# EAGLE board PD-adder (EAGLE 6.6.0)
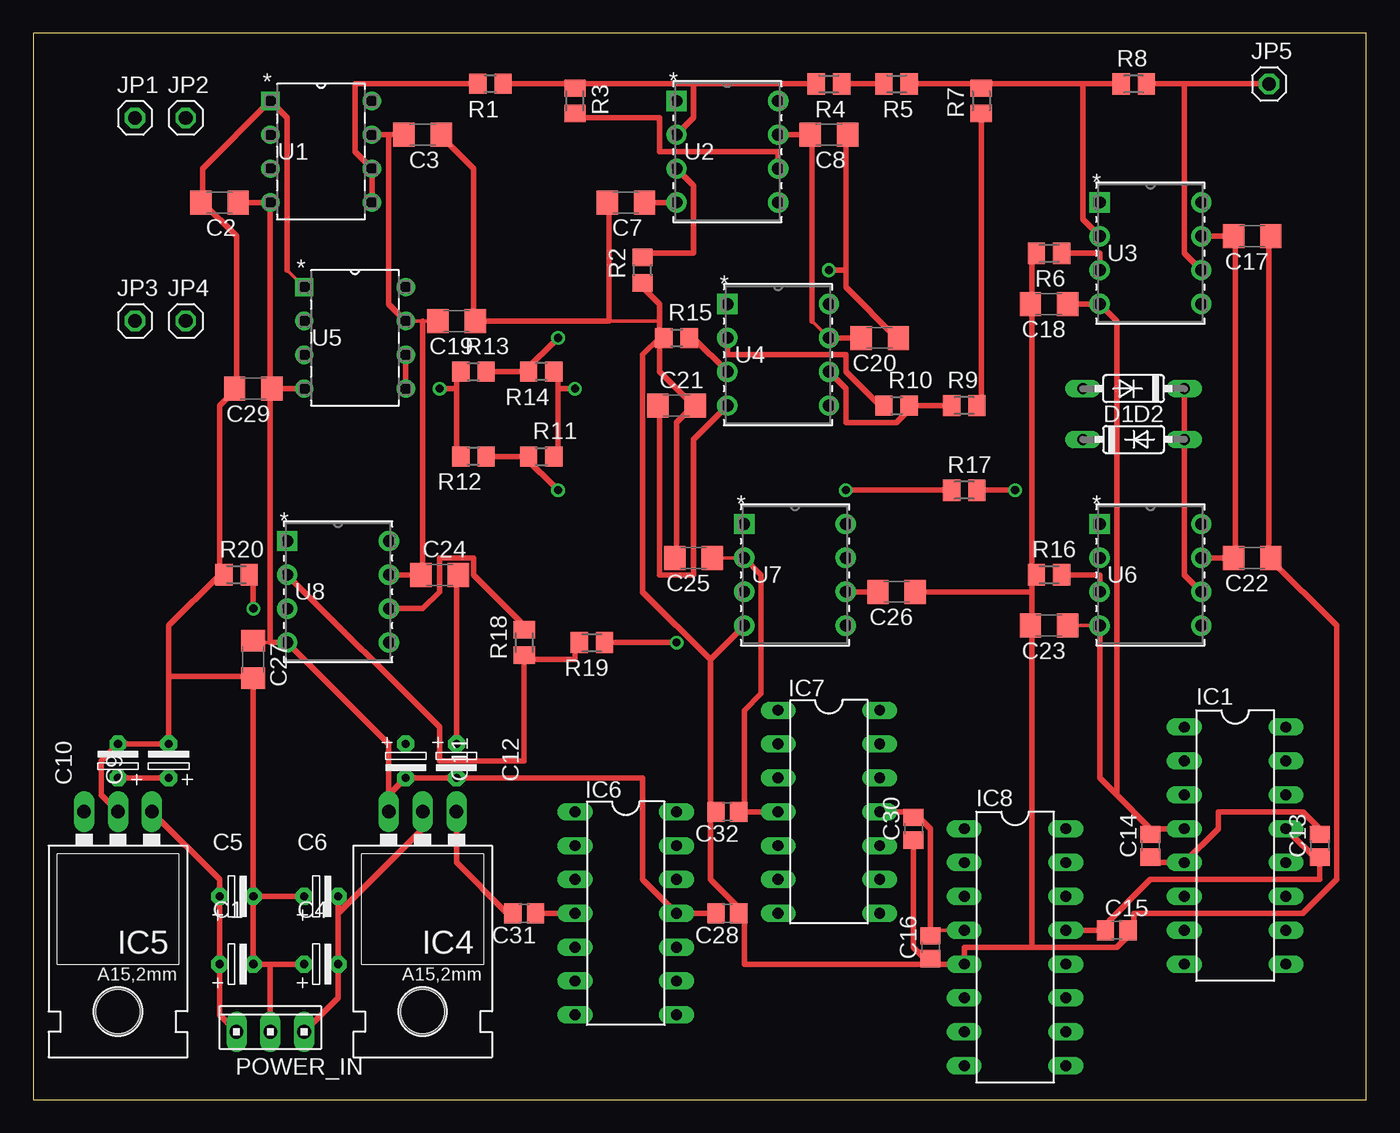
[diagram p0: board, top side]
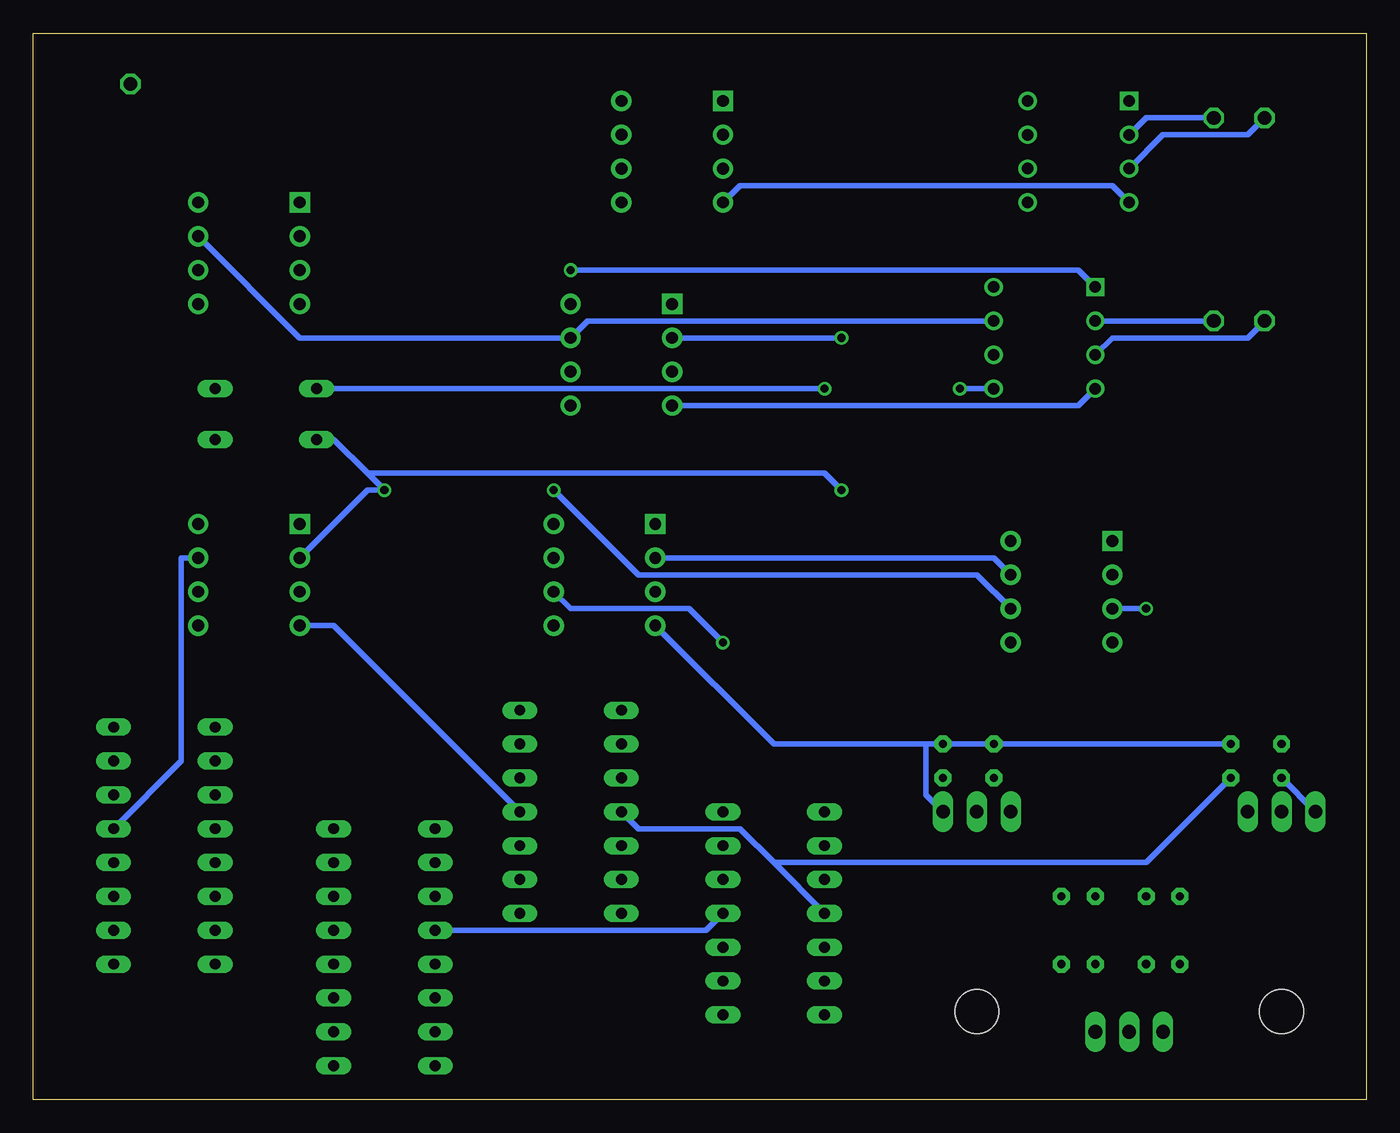
[diagram p1: board, bottom side, seen from below]

Size 100 x 80 mm. Coordinates in mm from the lower left corner, seen from the top.
Outline: 0,0 100,0 100,80 0,80 0,0
Copper layers (1*16): Top 0.035mm / dielectric 1.5mm / Bottom 0.035mm
Design rules "default": minimum track width 10mil, minimum drill 24mil, track to track 8mil, track to pad 8mil, pad to pad 8mil, via to via 8mil, smd to smd 8mil, copper to edge 40mil, drill to drill 8mil, minimum pad ring 10mil, minimum via ring 8mil, stop-mask expansion 4mil, vias tented up to drill 0mil, thermal gap 10mil
Net classes: 1 GND: width 0.406 mm, drill 0.61 mm, clearance 0.178 mm; 2 +15V: width 0.406 mm, drill 0.61 mm, clearance 0.178 mm; 3 -15V: width 0.406 mm, drill 0.61 mm, clearance 0.178 mm; 4 +18V: width 0.406 mm, drill 0.61 mm, clearance 0.178 mm; 5 -18V: width 0.406 mm, drill 0.61 mm, clearance 0.61 mm

## Footprints (pad centres in the part's own frame; a part is rotated, then mirrored left to right if it is on the bottom)
ES-2,5 = drill 0.61 pad 1.27 octagon: 1 -1.27,0; 2 1.27,0
C1206@1 = smd 1.6 x 1.8: 1 -1.4,0; 2 1.4,0
C0805 = smd 1.3 x 1.5: 1 -0.85,0; 2 0.85,0
DO35-7 = drill 0.813 long: A 3.81,0; C -3.81,0
DIL16 = drill 0.813 long: 1 -8.89,-3.81; 2 -6.35,-3.81; 3 -3.81,-3.81; 4 -1.27,-3.81; 5 1.27,-3.81; 6 3.81,-3.81; 7 6.35,-3.81; 8 8.89,-3.81; 9 8.89,3.81; 10 6.35,3.81; 11 3.81,3.81; 12 1.27,3.81; 13 -1.27,3.81; 14 -3.81,3.81; 15 -6.35,3.81; 16 -8.89,3.81
79XXL = drill 1.016 long: GND -2.54,-3.81; IN 0,-3.81; OUT 2.54,-3.81 | hole 3.302: 0,11.176
78XXL = drill 1.016 long: GND 0,-3.81; IN -2.54,-3.81; OUT 2.54,-3.81 | hole 3.302: 0,11.176
DIL14 = drill 0.813 long: 1 -7.62,-3.81; 2 -5.08,-3.81; 3 -2.54,-3.81; 4 0,-3.81; 5 2.54,-3.81; 6 5.08,-3.81; 7 7.62,-3.81; 8 7.62,3.81; 9 5.08,3.81; 10 2.54,3.81; 11 0,3.81; 12 -2.54,3.81; 13 -5.08,3.81; 14 -7.62,3.81
1X01 = drill 1.016 octagon: 1 0,0
10X03MTA = drill 1.016 long: 1 2.54,0; 2 0,0; 3 -2.54,0
R0805 = smd 1.3 x 1.5: 1 -0.95,0; 2 0.95,0
M0805 = smd 1.3 x 1.6: 1 -0.95,0; 2 0.95,0
P8 = drill 0.864 pad 1.372 square: 1 -7.62,7.62 | drill 0.864 pad 1.372: 2 -7.62,5.08; 3 -7.62,2.54; 4 -7.62,0; 5 0,0; 6 0,2.54; 7 0,5.08; 8 0,7.62
Q_8_ADI = drill 0.889 pad 1.524 square: 1 0,0 | drill 0.889 pad 1.524: 2 0,-2.54; 3 0,-5.08; 4 0,-7.62; 5 7.62,-7.62; 6 7.62,-5.08; 7 7.62,-2.54; 8 7.62,0

## Placement (x,y rotation side)
C1  1uF  [ES-2,5]  15.24,10.16 0 top
C2  100nF  [C1206@1]  13.97,67.31 180 top
C3  100nF  [C1206@1]  29.21,72.39 180 top
C4  1uF  [ES-2,5]  21.59,10.16 0 top
C5  1uF  [ES-2,5]  15.24,15.24 0 top
C6  1uF  [ES-2,5]  21.59,15.24 0 top
C7  100nF  [C1206@1]  44.45,67.31 180 top
C8  100nF  [C1206@1]  59.69,72.39 180 top
C9  1uF  [ES-2,5]  10.16,25.4 90 top
C10  1uF  [ES-2,5]  6.35,25.4 90 top
C11  1uF  [ES-2,5]  27.94,25.4 270 top
C12  1uF  [ES-2,5]  31.75,25.4 270 top
C13  100nF  [C0805]  96.52,19.05 90 top
C14  100nF  [C0805]  83.82,19.05 90 top
C15  100nF  [C0805]  81.28,12.7 0 top
C16  100nF  [C0805]  67.31,11.43 90 top
C17  100nF  [C1206@1]  91.44,64.77 180 top
C18  [C1206@1]  76.2,59.69 180 top
C19  100nF  [C1206@1]  31.75,58.42 180 top
C20  100nF  [C1206@1]  63.5,57.15 180 top
C21  100nF  [C1206@1]  48.26,52.07 0 top
C22  100nF  [C1206@1]  91.44,40.64 180 top
C23  100nF  [C1206@1]  76.2,35.56 180 top
C24  100nF  [C1206@1]  30.48,39.37 0 top
C25  100nF  [C1206@1]  49.53,40.64 180 top
C26  10uF  [C1206@1]  64.77,38.1 180 top
C27  100nF  [C1206@1]  16.51,33.02 270 top
C28  100nF  [C0805]  52.07,13.97 180 top
C29  100nF  [C1206@1]  16.51,53.34 180 top
C30  100nF  [C0805]  66.04,20.32 90 top
C31  100nF  [C0805]  36.83,13.97 180 top
C32  100nF  [C0805]  52.07,21.59 180 top
D1  1N4148DO35-7  [DO35-7]  82.55,49.53 0 top
D2  1N4148DO35-7  [DO35-7]  82.55,53.34 180 top
IC1  ADG221KN  [DIL16]  90.17,19.05 270 top
IC4  [79XXL]  29.21,17.78 180 top
IC5  [78XXL]  6.35,17.78 180 top
IC6  LF347N  [DIL14]  44.45,13.97 270 top
IC7  LF347N  [DIL14]  59.69,21.59 270 top
IC8  ADG222KN  [DIL16]  73.66,11.43 270 top
JP1  [1X01]  7.62,73.66 0 top
JP2  [1X01]  11.43,73.66 0 top
JP3  [1X01]  7.62,58.42 0 top
JP4  [1X01]  11.43,58.42 0 top
JP5  [1X01]  92.71,76.2 0 top
POWER_IN  [10X03MTA]  17.78,5.08 0 top
R1  680  [R0805]  34.29,76.2 180 top
R2  330  [R0805]  45.72,62.23 90 top
R3  680  [M0805]  40.64,74.93 270 top
R4  680  [M0805]  59.69,76.2 180 top
R5  680  [M0805]  64.77,76.2 180 top
R6  330  [M0805]  76.2,63.5 180 top
R7  680  [M0805]  71.12,74.93 90 top
R8  680  [M0805]  82.55,76.2 0 top
R9  680  [M0805]  69.85,52.07 0 top
R10  680  [R0805]  64.77,52.07 0 top
R11  680  [R0805]  38.1,48.26 0 top
R12  680  [R0805]  33.02,48.26 180 top
R13  680  [R0805]  33.02,54.61 0 top
R14  680  [R0805]  38.1,54.61 180 top
R15  330  [R0805]  48.26,57.15 0 top
R16  330  [M0805]  76.2,39.37 0 top
R17  680  [M0805]  69.85,45.72 0 top
R18  680  [M0805]  36.83,34.29 90 top
R19  680  [M0805]  41.91,34.29 180 top
R20  330  [M0805]  15.24,39.37 0 top
U1  INA105KP  [P8]  25.4,67.31 0 top
U2  OP27EZ  [Q_8_ADI]  48.26,74.93 0 top
U3  OP27EZ  [Q_8_ADI]  80.01,67.31 0 top
U4  OP27EZ  [Q_8_ADI]  52.07,59.69 0 top
U5  INA105KP  [P8]  27.94,53.34 0 top
U6  OP27EZ  [Q_8_ADI]  80.01,43.18 0 top
U7  REF01EZ  [Q_8_ADI]  53.34,43.18 0 top
U8  OP27EZ  [Q_8_ADI]  19.05,41.91 0 top

## Library data of the parts
C1 C4-C6 C9-C12 = discrete
C2 C3 C7 C8 C13-C32 R3-R20 = rcl
D1 D2 = diode
IC1 IC6-IC8 = linear
IC4 IC5 = v-reg
JP1-JP5 = pinhead
POWER_IN = con-amp
R1 R2 = eagle-ltspice; SPICEMODEL: NONE; SPICEPREFIX: R
U1 U5 = INA105KP; COPYRIGHT: Copyright (C) 2021 Ultra Librarian. All rights reserved.; MANUFACTURER_PART_NUMBER: INA105KP; MFR_NAME: Texas Instruments
U2-U4 U6 U8 = OP27EPZ; COPYRIGHT: Copyright (C) 2021 Ultra Librarian. All rights reserved.; MANUFACTURER_PART_NUMBER: OP27EZ; MFR_NAME: Analog Devices Inc
U7 = REF01EZ; COPYRIGHT: Copyright (C) 2021 Ultra Librarian. All rights reserved.; MANUFACTURER_PART_NUMBER: REF01EZ; MFR_NAME: Analog Devices Inc

## Nets
+15V: C3.2 C8.2 C9.1 C10.1 C13.1 C15.1 C17.2 C19.2 C20.2 C22.2 C24.1 C25.1 C31.1 C32.1 IC1.13 IC5.OUT IC6.4 IC7.4 IC8.13 U1.7 U2.7 U3.7 U4.7 U5.7 U6.7 U7.2 U8.7
+18V [+18V]: C1.1 C5.1 IC5.IN POWER_IN.3
-15V: C2.1 C7.1 C11.2 C12.2 C14.2 C16.2 C18.1 C21.1 C23.1 C27.1 C28.2 C29.1 C30.2 IC1.4 IC4.OUT IC6.11 IC7.11 IC8.4 U1.4 U2.4 U3.4 U4.4 U5.4 U6.4 U8.4
-18V [-18V]: C4.2 C6.2 IC4.IN POWER_IN.1
GND: C1.2 C2.2 C3.1 C4.1 C5.2 C6.1 C7.2 C8.1 C9.2 C10.2 C11.1 C12.1 C15.2 C16.1 C17.1 C18.2 C19.1 C20.1 C21.2 C22.1 C23.2 C24.2 C25.2 C26.1 C27.2 C28.1 C29.2 C30.1 C31.2 C32.2 IC4.GND IC5.GND IC8.5 POWER_IN.2 R2.1 R6.2 R15.1 R16.1 R20.1 U1.1 U5.1 U7.4
N$1: C13.2 C14.1 IC1.5
N$2: R2.2 U2.3
N$3: R3.2 U2.6
N$4: R4.1 R5.2
N$5: R5.1 R7.2 R8.1 U3.2
N$6: R7.1 R9.2
N$7: R9.1 R10.2 U4.6
N$8: R10.1 R13.2 R14.2 U4.2
N$9: R15.2 U4.3
N$10: D2.A R11.2 R14.1
N$11: R12.2 R13.1 U5.5 U5.6
N$12: D1.C R11.1 R12.1 R17.2 U6.2
N$13: R16.2 U6.3
N$14: R20.2 U8.3
N$15: R1.1 R3.1 R4.2 U2.2
N$16: R6.1 U3.3
N$17: R17.1 R18.2 U8.6
N$18: D1.A D2.C U6.6
N$20: R18.1 R19.2 U8.2
N$21: C26.2 R19.1 U7.6
V_OUT: JP5.1 R8.2 U3.6
VHI-IN+: JP1.1 U1.3
VHI-IN-: JP2.1 U1.2
VLO-IN+: JP3.1 U5.3
VLO-IN-: JP4.1 U5.2
VOUT: R1.2 U1.5 U1.6

## Tracks (layer width: path | path; a pad name or v marks a point on that pad's centre or on a via)
+15V
  Top 0.254: 62.23,57.15 C20.2 | 58.42,58.42 U4.7 | 58.42,72.39 C8.2 | U5.7 29.21,58.42 C19.2 30.48,58.42 | 29.21,39.37 C24.1 | U7.2 C25.1 50.8,40.64
  Top 0.406: IC8.13 80.01,12.7 | IC1.13 96.52,17.78 | 80.01,12.7 83.82,16.51 96.52,16.51 96.52,17.78 | 80.01,12.7 C15.1 | 96.52,17.78 C13.1 | U6.7 C22.2 90.17,40.64 90.17,64.77 C17.2 U3.7 | U4.7 C20.2 | U2.7 C8.2 | 58.42,72.39 58.42,58.42 | U8.7 C24.1 | U1.7 26.67,72.39 | 26.67,72.39 C3.2 27.94,72.39 | U5.7 26.67,59.69 26.67,72.39 | 29.21,58.42 29.21,39.37 | C10.1 C9.1 | IC6.4 C31.1 | IC7.4 53.34,21.59 | U7.2 54.61,39.37 54.61,30.48 53.34,29.21 53.34,21.59 | 53.34,21.59 C32.1
  Bottom 0.406: IC1.13 88.9,25.4 88.9,40.64 U6.7 | U5.7 58.42,58.42 U4.7 80.01,57.15 U3.7 | IC5.OUT C10.1 | 44.45,17.78 46.99,20.32 54.61,20.32 IC7.4 | 44.45,17.78 IC6.4 | C9.1 16.51,17.78 44.45,17.78 | U8.7 27.94,40.64 U7.2
+18V
  Top 0.406: POWER_IN.3 13.97,6.35 C1.1 C5.1 13.97,16.51 IC5.IN
-15V
  Top 0.254: 17.78,34.29 16.51,34.29 | 46.99,52.07 C21.1 | 45.72,67.31 C7.1 | 17.78,53.34 C29.1 | IC8.4 67.31,12.7 | U6.4 C23.1 77.47,35.56
  Top 0.406: 16.51,34.29 C27.1 | 26.67,22.86 C11.2 C12.2 45.72,24.13 45.72,16.51 IC6.11 C28.2 | 26.67,22.86 26.67,26.67 U8.4 17.78,34.29 17.78,53.34 U1.4 C2.1 15.24,67.31 | 26.67,22.86 IC4.OUT | 46.99,52.07 46.99,39.37 49.53,39.37 49.53,49.53 U4.4 | U2.4 C7.1 | U5.4 C29.1 | IC7.11 66.04,21.59 | 66.04,21.59 67.31,20.32 67.31,12.7 C16.2 | 66.04,21.59 C30.2 | 77.47,59.69 C18.1 U3.4 81.28,58.42 81.28,22.86 | IC1.4 83.82,20.32 | 81.28,22.86 80.01,24.13 U6.4 | 81.28,22.86 83.82,20.32 | 83.82,20.32 C14.2
  Bottom 0.406: U2.4 46.99,68.58 19.05,68.58 U1.4 | U4.4 21.59,52.07 U5.4 | IC6.11 49.53,12.7 IC8.4 | IC7.11 77.47,35.56 U6.4
-18V
  Top 0.406: C6.2 22.86,13.97 | 22.86,13.97 C4.2 22.86,7.62 POWER_IN.1 | IC4.IN 29.21,20.32 22.86,13.97
GND  (via drill 0.61)
  Top 0.254: 74.93,35.56 C23.2 | 48.26,40.64 C25.2 | 46.99,58.42 43.18,58.42 | 33.02,58.42 C19.1 | 49.53,52.07 C21.2 | 31.75,39.37 C24.2 | 46.99,57.15 R15.1 | 64.77,57.15 C20.1 | 19.05,62.23 U5.1 | 16.51,31.75 C27.2
  Top 0.406: 74.93,59.69 74.93,63.5 R6.2 | 74.93,38.1 74.93,35.56 74.93,11.43 | 74.93,38.1 74.93,39.37 | 74.93,38.1 C26.1 66.04,38.1 | 74.93,39.37 74.93,59.69 | 74.93,59.69 C18.2 | 74.93,39.37 R16.1 | 92.71,40.64 92.71,64.77 C17.1 | 67.31,10.16 IC8.5 69.85,11.43 74.93,11.43 | 82.55,12.7 81.28,11.43 74.93,11.43 | C30.1 66.04,11.43 67.31,10.16 | 92.71,40.64 97.79,35.56 97.79,16.51 95.25,13.97 82.55,13.97 82.55,12.7 | 92.71,40.64 C22.1 | 82.55,12.7 C15.2 | 48.26,40.64 48.26,50.8 49.53,52.07 46.99,54.61 46.99,57.15 | 46.99,57.15 46.99,58.42 46.99,59.69 45.72,60.96 R2.1 | C19.1 43.18,58.42 43.18,67.31 C7.2 | 33.02,58.42 33.02,69.85 30.48,72.39 C3.1 | 53.34,13.97 50.8,16.51 50.8,21.59 | 50.8,33.02 U7.4 | 50.8,21.59 50.8,33.02 | 50.8,21.59 C32.2 | IC4.GND 31.75,17.78 35.56,13.97 C31.2 | C12.1 31.75,39.37 | 46.99,57.15 45.72,55.88 45.72,38.1 50.8,33.02 | 64.77,57.15 60.96,60.96 60.96,62.23 | 60.96,62.23 60.96,72.39 C8.1 | C6.1 C5.2 | C4.1 17.78,10.16 | 17.78,10.16 C1.2 C5.2 | 17.78,10.16 POWER_IN.2 | 13.97,39.37 10.16,35.56 10.16,31.75 | 10.16,31.75 C9.2 C10.2 5.08,25.4 5.08,22.86 IC5.GND | 10.16,31.75 16.51,31.75 | 15.24,53.34 13.97,52.07 13.97,39.37 | 13.97,39.37 R20.1 | 12.7,67.31 15.24,64.77 15.24,53.34 | 15.24,53.34 C29.2 | 12.7,67.31 12.7,69.85 U1.1 19.05,73.66 19.05,62.23 | 12.7,67.31 C2.2 | C27.2 C5.2 | v59.69,62.23 60.96,62.23 | 67.31,10.16 53.34,10.16 53.34,13.97 | 67.31,10.16 C16.1 | 53.34,13.97 C28.1
  Bottom 0.406: IC4.GND 33.02,22.86 33.02,26.67 | 33.02,26.67 C12.1 C11.1 C9.2 | U7.4 44.45,26.67 33.02,26.67 | v59.69,62.23 21.59,62.23 U5.1
N$1
  Top 0.406: C14.1 83.82,17.78 IC1.5 88.9,20.32 88.9,21.59 95.25,21.59 96.52,20.32 C13.2
N$2
  Top 0.406: U2.3 49.53,68.58 49.53,63.5 45.72,63.5 R2.2
N$3
  Top 0.406: U2.6 55.88,71.12 46.99,71.12 46.99,73.66 40.64,73.66 R3.2
N$4
  Top 0.406: R5.2 R4.1
N$5
  Top 0.254: 71.12,76.2 R7.2
  Top 0.406: R5.1 71.12,76.2 78.74,76.2 | 78.74,76.2 R8.1 | U3.2 78.74,66.04 78.74,76.2
N$6
  Top 0.406: R7.1 71.12,52.07 R9.2
N$7
  Top 0.406: R9.1 66.04,52.07 | 66.04,52.07 64.77,50.8 60.96,50.8 60.96,53.34 U4.6 | 66.04,52.07 R10.2
N$8  (via drill 0.61)
  Top 0.406: 36.83,54.61 R13.2 | U4.2 52.07,55.88 60.96,55.88 60.96,54.61 63.5,52.07 R10.1 | v39.37,57.15 36.83,54.61 | 36.83,54.61 R14.2
  Bottom 0.406: U4.2 v39.37,57.15
N$9
  Top 0.254: 49.53,57.15 R15.2
  Top 0.406: U4.3 49.53,57.15
N$10  (via drill 0.61)
  Top 0.406: 39.37,53.34 39.37,54.61 R14.1 | 39.37,53.34 39.37,48.26 R11.2 | 39.37,53.34 v40.64,53.34
  Bottom 0.406: v40.64,53.34 D2.A
N$11  (via drill 0.61)
  Top 0.406: U5.6 U5.5 | 31.75,53.34 31.75,54.61 R13.1 | 31.75,53.34 31.75,48.26 R12.2 | 31.75,53.34 v30.48,53.34
  Bottom 0.406: v30.48,53.34 U5.5
N$12  (via drill 0.61)
  Top 0.406: 36.83,48.26 R12.1 | v73.66,45.72 R17.2 | v39.37,45.72 36.83,48.26 | 36.83,48.26 R11.1
  Bottom 0.254: D1.C 77.47,49.53
  Bottom 0.406: 77.47,49.53 74.93,46.99 | 74.93,46.99 v73.66,45.72 74.93,45.72 U6.2 | v39.37,45.72 40.64,46.99 74.93,46.99
N$13
  Top 0.406: R16.2 80.01,39.37 U6.3
N$14  (via drill 0.61)
  Top 0.406: v16.51,36.83 16.51,39.37 R20.2
  Bottom 0.406: U8.3 v16.51,36.83
N$15
  Top 0.254: 40.64,76.2 R3.1
  Top 0.406: R1.1 40.64,76.2 49.53,76.2 | 49.53,76.2 R4.2 | U2.2 49.53,73.66 49.53,76.2
N$16
  Top 0.406: R6.1 80.01,63.5 U3.3
N$17  (via drill 0.61)
  Top 0.254: 36.83,35.56 R18.2
  Top 0.406: 36.83,35.56 33.02,39.37 33.02,40.64 30.48,40.64 30.48,38.1 29.21,36.83 U8.6 | v60.96,45.72 R17.1
  Bottom 0.406: v60.96,45.72 54.61,39.37 29.21,39.37 U8.6
N$18
  Top 0.406: D2.C D1.A 86.36,39.37 U6.6
N$20
  Top 0.254: 40.64,34.29 R19.2 | 36.83,33.02 R18.1
  Top 0.406: 40.64,34.29 40.64,33.02 36.83,33.02 36.83,25.4 30.48,25.4 30.48,27.94 U8.2
N$21  (via drill 0.61)
  Top 0.406: v48.26,34.29 R19.1 | U7.6 C26.2 63.5,38.1
  Bottom 0.406: v48.26,34.29 50.8,36.83 59.69,36.83 U7.6
V_OUT
  Top 0.406: JP5.1 86.36,76.2 | 86.36,76.2 R8.2 | U3.6 86.36,63.5 86.36,76.2
VHI-IN+
  Bottom 0.406: U1.3 15.24,72.39 8.89,72.39 JP1.1
VHI-IN-
  Bottom 0.406: U1.2 16.51,73.66 JP2.1
VLO-IN+
  Bottom 0.406: U5.3 19.05,57.15 8.89,57.15 JP3.1
VLO-IN-
  Bottom 0.406: JP4.1 U5.2
VOUT
  Top 0.406: R1.2 24.13,76.2 24.13,71.12 U1.6 U1.5